# EAGLE board SwitchMult_panel (EAGLE 6.6.0)

Size 128.5 x 20 mm. Coordinates in mm from the lower left corner, seen from the top.
Outline: 0,20 0,0 128.5,0 128.5,20 0,20
Copper layers (1*16): Top 0.035mm / dielectric 1.5mm / Bottom 0.035mm
Design rules "PatternAgents_7mil": minimum track width 7mil, minimum drill 14mil, track to track 7mil, track to pad 7mil, pad to pad 7mil, via to via 7mil, smd to smd 7mil, copper to edge 7mil, drill to drill 7mil, minimum pad ring 12mil, minimum via ring 10mil, stop-mask expansion 4mil, vias tented up to drill 25mil, thermal gap 7mil
Holes 6.1 mm at 52,5 66,15 52,15 38,5 24,5 80,15 94,15 108,15
Holes 8.5 mm at 66,5.25 80,5.25 94,5.25 108,5.25
Holes 4 mm at 3,12.5 125.5,12.5

## Placement (x,y rotation side)
U$1  PA_LOGO_SYMLARGE  [PA_LOGO_AGENT_LRG_SYM]  12.7,10.16 90 bottom

## Library data of the parts
U$1 = PatternAgents-Logos

## Tracks (layer width: path | path; a pad name or v marks a point on that pad's centre or on a via)
(copper drawn outside any net)
  shapes: Bottom area x1

## Text on the board
tPlace: Switch Mult | Halcyon / Modular | MIX / BUS | MIX / BUS | MIX / BUS | CV / BUS | GATE / BUS | CV / BUS | GATE / BUS
bPlace: PatternAgents